# Altium PCB DiPho_digital.PcbDoc (part 3 of 3)
Units mm, origin at the board's own origin, x right, y up, seen from the top; angles counter-clockwise.
Board outline 25.2 x 25.2 mm, 4 copper layers (Top Layer, GND, Inner Layer 2, Bottom Layer), stack 1.562 mm thick; 68 components, 54 nets, 272 pads, 116 vias.
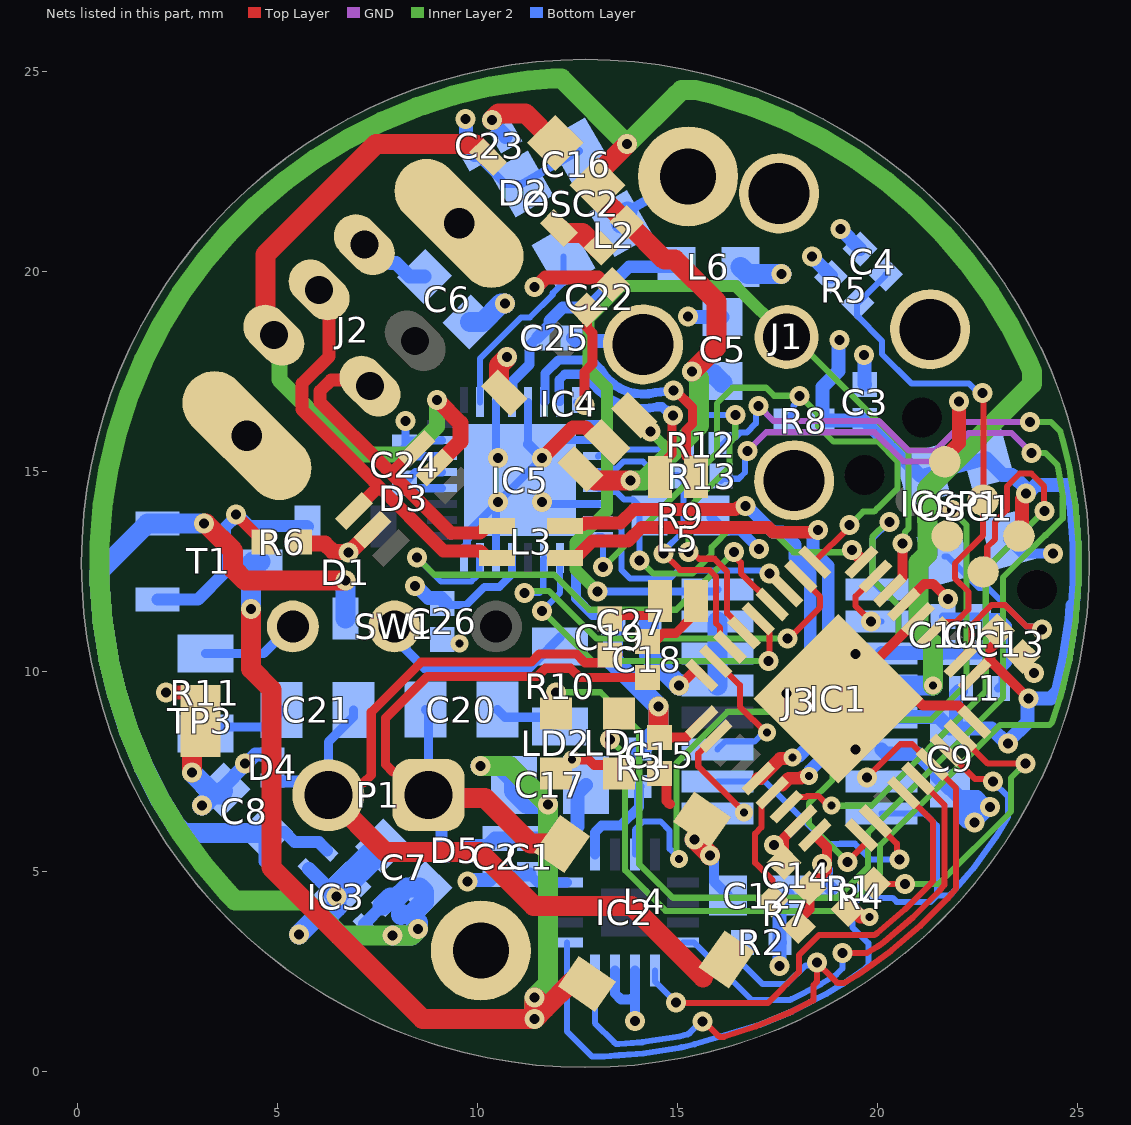
[diagram p4: the nets of this part, all layers, seen from the top]

## Via types
v1: diameter 0.5, hole 0.25, Top Layer to Bottom Layer, tented both sides, 104 vias
v2: diameter 0.45, hole 0.2, Top Layer to Bottom Layer, tented both sides, 10 vias
v3: diameter 0.5, hole 0.25, GND to Inner Layer 2, tented both sides, 2 vias

## Nets (pads, with @x,y where several pads share a name; then routed paths per layer and width w, separated by ;. In a path a pad name is that pad's centre, name@x,y a point inside that pad or via, vN(x,y) a via of type N, cw(c..) or ccw(c..) an arc to the next point about the centre after c; other vN are vias at no path point) (continued)
DAC0_OUT: IC2.3 J3.16 | length 17.1
  Inner Layer 2 w0.152: v2(15.037,5.309) 14.98,5.366 14.98,5.603 14.972,5.61 14.972,7.708 16.256,8.992 18.694,8.992 20.523,10.82 20.523,11.659 19.876,12.306 19.876,13.368 20.241,13.733 v1(20.295,13.733)
  Bottom Layer w0.152: IC2.3@13.938,5.426 13.938,6.039 14.148,6.248 14.578,6.248 14.806,6.02 14.806,5.562 15.037,5.332 v2(15.037,5.309) ; J3.16@20.1,12.05 20.075,12.05 19.876,12.249 19.876,13.314 v1(20.295,13.733)
DAC_LAT0: IC1.31 IC2.9 | length 11.5
  Top Layer w0.152: v1(14.961,1.727) 14.981,1.707 17.257,1.707 18.036,2.486 18.036,2.907 18.541,3.412 19.178,3.412 19.181,3.409 19.878,3.409 19.928,3.409 19.989,3.454 20.692,4.054 21.346,4.708 21.393,4.763 21.393,6.237 IC1.31@20.66,6.97
  Bottom Layer w0.152: IC2.9@14.438,2.526 14.438,2.251 14.961,1.729 v1(14.961,1.727)
DAC_LAT1: IC1.32 IC2.8 | length 11.3
  Top Layer w0.152: v1(19.126,2.959) 19.734,2.959 20.013,3.126 20.019,3.13 20.162,3.234 20.882,3.849 21.551,4.518 21.673,4.66 21.673,6.665 21.662,6.676 IC1.32@21.014,7.323
  Bottom Layer w0.152: IC2.8@15.138,3.226 15.413,3.226 16.851,1.788 17.777,1.788 17.814,1.788 17.846,1.804 18.59,2.183 18.961,2.411 18.974,2.423 19.126,2.576 v1(19.126,2.959)
ETH_LINE_CFILT_N: C19.1 L5.4 | length 1.3
  Top Layer w0.231: C19.1@13.513,11.321 13.592,11.4 14.25,11.4 14.435,11.585 L5.4@14.435,11.81
ETH_LINE_CFILT_P: C18.1 L5.1 | length 1.6
  Top Layer w0.231: C18.1@14.453,10.762 14.647,10.957 14.957,10.957 15.327,11.326 15.327,11.701 L5.1@15.435,11.81
ETH_LINE_DCFILT_N: C19.2 C21.2 D4.2 L4.3 P1.2 | length 25.9
  Top Layer w0.231: P1.2@6.275,6.909 6.575,7.209 7.147,7.209 7.346,7.408 7.346,8.983 8.596,10.233 11.346,10.233 11.553,10.439 12.471,10.439 12.691,10.22 13.183,10.22 13.19,10.226 13.318,10.226 C19.2@13.513,10.421 ; 15.638,2.354 15.768,2.354 16.267,2.853 L4.3@16.306,2.853
  Top Layer w0.5: P1.2@6.275,6.909 7.702,5.482 10.063,5.482 11.405,4.14 13.851,4.14 15.638,2.354
  Bottom Layer w0.231: P1.2@6.275,6.909 6.275,8.239 6.9,8.864 C21.2@6.9,9.039
  Bottom Layer w0.3: D4.2@4.877,7.27 4.902,7.245 5.533,7.245 5.869,6.909 P1.2@6.275,6.909
ETH_LINE_DCFILT_P: C18.2 C20.2 D5.2 L4.1 P1.1 | length 17.2
  Top Layer w0.231: P1.1@8.775,6.909 8.197,7.487 7.889,7.487 7.704,7.672 7.704,8.835 8.744,9.875 11.494,9.875 11.701,10.082 12.323,10.082 12.555,9.85 C18.2@14.249,9.85
  Top Layer w0.5: P1.1@8.851,6.833 10.192,6.833 11.323,5.702 12.163,5.702 L4.1@12.193,5.732
  Bottom Layer w0.231: C20.2@8.701,9.042 8.775,8.969 P1.1@8.775,6.909
  Bottom Layer w0.3: P1.1@8.775,6.909 9.099,6.584 9.099,5.536 D5.2@9.124,5.512
ETH_LINE_N: IC5.7 L5.3 | length 5.4
  Top Layer w0.231: L5.3@14.435,15.085 14.511,15.085 14.865,15.438 14.865,16.375 v1(14.883,16.393)
  Bottom Layer w0.2: IC5.7@12.053,16.745 IC5.7@12.069,16.73
  Bottom Layer w0.231: IC5.7@12.053,16.745 12.053,17.02 12.047,17.026 12.047,17.294 12.182,17.429 12.69,17.429 12.758,17.361 12.777,17.343 ccw(c14.142,18.176) 14.495,16.616 14.519,16.616 14.615,16.616 14.695,16.535 14.746,16.527 14.805,16.468 cw(c14.642,16.305) 14.806,16.467 14.829,16.445 14.832,16.445 14.851,16.425 14.864,16.412 v1(14.883,16.393)
ETH_LINE_P: IC5.6 L5.2 | length 6.9
  Top Layer w0.231: v1(14.907,17.02) 14.953,17.02 15.375,16.597 15.375,16.189 15.222,16.036 15.222,15.374 15.435,15.161 L5.2@15.435,14.86
  Bottom Layer w0.2: IC5.6@11.669,16.73 IC5.6@11.684,16.745
  Bottom Layer w0.231: IC5.6@11.684,16.745 11.684,17.02 11.69,17.026 11.69,17.451 12.026,17.787 12.595,17.787 12.838,17.787 13.061,17.563 ccw(c14.142,18.176) 14.452,16.973 14.882,17.016 ccw(c14.859,17.245) v1(14.907,17.02)
ETH_PHY_CLK: IC5.2 OSC2.3 | length 4.6
  Bottom Layer w0.152: IC5.2@10.069,16.73 10.069,17.827 11.094,18.852 11.314,18.852 11.883,19.421 11.883,19.456 12.155,19.728 OSC2.3@12.155,20.37
ETH_PHY_DIO1: IC1.15 IC5.11 R12.1 | length 10.8
  Top Layer w0.152: v1(15.276,12.991) 15.366,12.991 15.539,12.818 15.922,12.818 16.244,12.496 16.244,11.456 16.665,11.034 IC1.15@16.665,10.965
  Inner Layer 2 w0.152: v1(15.276,12.991) 15.276,14.091 16.303,15.117 16.303,15.718 16.446,15.862 v1(16.446,16.407)
  Bottom Layer w0.152: IC5.11@13.019,15.38 13.042,15.404 13.317,15.404 13.39,15.477 13.483,15.477 13.555,15.549 15.057,15.549 R12.1@15.149,15.641 ; R12.1@15.126,15.672 15.302,15.848 15.302,16.114 15.595,16.407 v1(16.446,16.407)
ETH_PHY_DIO2: IC1.16 IC5.12 R13.1 | length 8
  Top Layer w0.152: v1(14.65,12.954) 15.066,12.538 15.795,12.538 15.964,12.369 15.964,11.34 15.964,11.202 16.064,11.102 16.064,10.859 IC1.16@16.312,10.611
  Bottom Layer w0.152: IC5.12@13.019,14.98 13.042,15.004 13.317,15.004 13.39,15.077 13.478,15.077 13.647,15.246 14.139,15.246 14.475,14.91 14.996,14.91 R13.1@15.151,14.755 ; v1(14.65,12.954) 14.65,13.006 15.151,13.507 R13.1@15.151,14.755 ; R13.1@15.151,14.884 R13.1@15.151,14.755
ETH_RST: IC1.9 IC5.13 R9.1 | length 9.3
  Top Layer w0.152: IC1.9@19.6,12.733 IC1.9@19.6,12.798
  Top Layer w0.3: v1(19.36,13.038) IC1.9@19.6,12.798
  Inner Layer 2 w0.152: v1(14.05,12.772) 14.074,12.772 14.401,12.446 15.372,12.446 15.855,12.929 15.855,13.106 16.338,13.589 17.297,13.589 17.906,12.98 19.303,12.98 v1(19.36,13.038)
  Bottom Layer w0.152: IC5.13@13.019,14.58 13.042,14.556 13.317,14.556 13.39,14.483 13.478,14.483 13.659,14.302 13.888,14.302 R9.1@14.11,14.081 ; v1(14.05,12.772) 14.05,14.008 R9.1@14.122,14.081
ETH_SPI.CSN: IC1.11 IC5.19 | length 10.5
  Top Layer w0.152: v1(17.755,10.819) 17.779,10.819 18.567,11.608 18.567,11.872 18.079,12.36 IC1.11@18.079,12.379
  Inner Layer 2 w0.152: v1(11.176,11.963) 11.227,12.014 11.786,12.014 12.98,10.819 v1(17.755,10.819)
  Bottom Layer w0.152: v1(11.176,11.963) 11.556,11.963 11.645,12.053 11.645,12.806 IC5.19@11.669,12.83
ETH_SPI.INT: IC1.10 IC5.16 R8.1 | length 16.1
  Top Layer w0.152: IC1.10@18.424,12.742 19.303,13.622 v1(19.303,13.662)
  Inner Layer 2 w0.152: v1(13.141,12.608) 15.987,15.454 15.987,16.699 16.381,17.092 17.217,17.092 17.417,16.892 v1(18.055,16.892) 18.51,16.438 18.51,16.136 18.898,15.748 20.003,15.748 20.498,15.253 20.498,14.572 20.017,14.091 20.012,14.091 19.917,13.996 19.646,13.996 19.312,13.662 v1(19.303,13.662)
  Bottom Layer w0.152: IC5.16@13.019,13.38 13.117,13.38 13.141,13.356 v1(13.141,12.608) ; R8.1@17.691,16.268 17.905,16.482 17.905,16.648 18.055,16.798 v1(18.055,16.892)
ETH_SPI.MISO: IC1.13 IC5.23 | length 13
  Top Layer w0.152: v1(16.408,12.981) 16.408,12.896 16.586,12.718 16.586,12.458 IC1.13@17.358,11.687
  Inner Layer 2 w0.152: v1(8.484,12.852) 8.919,12.417 11.917,12.417 12.791,11.543 14.969,11.543 v1(16.408,12.981)
  Bottom Layer w0.152: v1(8.484,12.852) 9.087,12.249 9.85,12.249 9.972,12.371 10.045,12.444 10.045,12.806 IC5.23@10.069,12.83
ETH_SPI.MOSI: IC1.14 IC5.18 | length 8.9
  Top Layer w0.152: IC1.14@17.019,11.319 17.019,11.25 17.301,10.967 17.301,10.286 v1(17.277,10.262)
  Inner Layer 2 w0.152: v1(11.62,11.515) 12.873,10.262 v1(17.277,10.262)
  Bottom Layer w0.152: v1(11.62,11.515) 11.62,11.521 12.069,11.969 IC5.18@12.069,12.83
ETH_SPI.SCLK: IC1.12 IC5.15 | length 6.2
  Top Layer w0.152: v1@17.206,12.545 IC1.12@17.726,12.026
  Bottom Layer w0.152: IC5.15@13.019,13.78 13.042,13.756 13.405,13.756 13.478,13.683 13.597,13.564 13.597,12.54 13.818,12.319 14.807,12.319 15.016,12.528 17.189,12.528 v1@17.206,12.545
  other v1: 17.306,12.445
GND: C1.1 C2.1 C3.1 C4.1 C5.1 C6.1 C7.1 C8.1 C9.1 C10.1 C11.1 C12.1 C13.1 C14.1 C15.1 C16.1 C17.1 C23.1 C24.1 C25.1 C26.1 C27.1 D3.2 D4.1 D5.1 IC1.5 IC1.18 IC1.26 IC1.36 IC1.37 IC2.10 IC2.11 IC3.3 IC3.5 IC3.EP IC4.2 IC5.3 IC5.5 IC5.9 IC5.10 IC5.14 IC5.22 IC5.24 IC5.30 IC5.31 IC5.33 ICSP1.5 J1.C1 J1.C2 J1.C3 J1.C4 J2.GND J2.SH1 J2.SH2 J3.2 J3.3 J3.4 J3.11 J3.14 L4.4 LD1.1 LD2.1 OSC1.2 OSC2.2 pad.2 R4.2 R6.1 TP3.1 | length 74.6
  Top Layer w0.25: v2(12.363,7.8) 12.774,7.8 12.914,7.66 13.332,7.66 LD1.1@13.538,7.454 ; C15.1@14.554,7.449 14.724,7.28 14.724,6.764 14.808,6.68 ; v1(15.037,9.652) 15.064,9.652 15.407,9.996 15.513,9.996 IC1.18@15.605,9.904 ; IC1.5@21.014,11.319 IC1.37@19.016,9.321 20.961,9.321 21.138,9.144 22.022,9.144 IC1.36@22.428,8.738
  Top Layer w0.254: C14.1@17.665,5.22 17.665,5.845 18.079,6.26 IC1.26@18.079,6.263 ; C13.1@23.648,10.388 23.648,10.285 23.909,10.023 v1(23.909,9.957)
  Top Layer w0.35: v1(2.21,9.474) 2.748,9.474 3.073,9.149 TP3.1@3.073,8.763 ; v1(11.619,15.33) 12.393,16.104 12.7,16.104 13.071,15.733 IC4.2@13.248,15.733 ; R4.2@19.251,4.036 19.414,4.036 19.575,3.875 19.782,3.875 v2(19.802,3.856) ; ICSP1.5@21.686,15.238 21.686,15.357 22.035,15.707 v1(22.035,16.742)
  Top Layer w0.4: R6.1@5.575,13.233 5.614,13.195 6.185,13.195 6.39,12.99 6.744,12.99 v1@6.755,12.979 ; v1(6.782,12.979) 6.807,12.979 D3.2@7.376,13.548
  Top Layer w0.5: v1(2.87,7.468) 2.87,8.56 TP3.1@3.073,8.763 ; v1(10.359,23.781) 10.53,23.952 11.201,23.952 C16.1@11.941,23.213 ; v1(15.426,5.798) 15.815,5.408 v1(15.815,5.402)
  Bottom Layer w0.2: IC5.22@10.469,12.83 IC5.33@10.469,14.18 ; IC5.3@10.469,16.73 10.469,15.38 v1(10.519,15.33) ; IC5.33@11.269,15.68 IC5.5@11.269,16.73 ; IC5.33@11.669,14.18 IC5.14@13.019,14.18 ; IC5.33@12.069,15.78 IC5.10@13.019,15.78
  Bottom Layer w0.203: v1(8.204,16.256) C24.1@8.204,15.639 ; IC5.30@9.119,15.38 8.413,15.38 C24.1@8.179,15.614 C24.1@8.204,15.639 ; IC5.31@9.119,15.78 9.112,15.773 8.338,15.773 C24.1@8.204,15.639 ; IC5.24@9.67,13.103 9.74,13.173 9.74,13.299 9.77,13.33 9.77,13.481 10.469,14.18 IC5.33@11.069,14.78 12.069,15.78 12.367,16.078 12.645,16.078 12.747,16.18 IC5.9@13.019,16.18
  Bottom Layer w0.25: IC2.11@13.438,2.526 13.438,1.95 13.585,1.803 13.843,1.803 13.938,1.899 ; OSC2.2@13.752,21.503 pad.2@15.265,22.377 ; IC2.10@13.938,2.526 13.938,1.899 ; v1(13.945,1.266) 13.938,1.272 13.938,1.899 ; v1(15.815,5.402) 15.815,5.335 15.918,5.232 15.918,4.744 C12.1@16.268,4.394 ; OSC1.2@23.268,13.296 23.614,12.95 v1(24.387,12.95)
  Bottom Layer w0.254: IC5.33@11.269,15.68 v1(11.619,15.33) ; v1(11.619,14.23) IC5.33@11.669,14.18
  Bottom Layer w0.35: C8.1@3.635,7.01 C8.1@3.635,7.033 ; C8.1@3.635,7.1 4.191,7.656 v1(4.191,7.696) 4.232,7.696 4.455,7.92 D4.1@4.877,7.92 ; IC3.5@5.784,5.062 v1(6.473,4.372) IC3.EP@6.473,4.505 ; IC3.EP@6.222,3.846 6.222,3.74 6.703,3.259 IC3.3@6.703,3.223 ; J2.GND@7.172,20.669 7.527,20.313 7.73,20.313 7.831,20.213 7.96,20.213 8.304,19.87 C6.1@8.68,19.87 ; C7.1@7.496,5.528 C7.1@7.496,5.661 ; D5.1@9.774,5.512 9.774,5.637 10.254,5.637 C2.1@10.439,5.822 C1.1@11.303,5.822 12.197,5.822 12.497,6.121 12.497,6.949 C17.1@12.711,7.163 ; v1(10.359,23.781) 10.359,23.744 10.702,23.401 C23.1@10.702,23.364 ; C25.1@12.388,18.339 12.469,18.257 14.061,18.257 J1.C1@14.142,18.176 ; v1(15.265,18.872) 15.272,18.866 16.123,18.866 C5.1@16.129,18.859 ; v1(19.075,21.057) C4.1@19.567,20.565 ; v1(19.661,17.905) 19.673,17.893 19.673,17.188 C3.1@19.685,17.176 ; J3.11@20.1,8.05 20.2,7.95 21.002,7.95 21.494,7.458 21.494,7.373 21.794,7.073 C9.1@21.819,7.073 ; J3.14@20.1,10.45 20.111,10.461 21.63,10.461 C10.1@21.641,10.472 C11.1@22.53,10.472 ; C9.1@21.819,7.073 22.029,6.863 C9.1@22.049,6.863 ; C9.1@21.819,7.073 21.838,7.073 C9.1@22.049,6.863 ; C9.1@22.049,6.863 22.138,6.773 22.138,6.555 ; C9.1@22.049,6.863 22.485,6.863 22.657,6.691 22.698,6.691 22.773,6.617 v1(22.813,6.617) ; 22.138,6.555 22.138,6.337 22.228,6.247 22.393,6.247 v1(22.422,6.219) 22.422,6.222 22.813,6.613 v1(22.813,6.617) ; 22.138,6.555 22.171,6.588 22.785,6.588 v1(22.813,6.617)
  Bottom Layer w0.5: v1(2.87,7.468) C8.1@3.311,7.027 ; v1(3.114,6.646) C8.1@3.392,6.923 ; C8.1@3.391,6.924 3.548,6.924 C8.1@3.635,7.01 ; v1(5.537,3.429) 6.088,3.98 6.222,3.846 6.473,4.097 v1(6.473,4.372) ; OSC2.2@13.584,21.195 OSC2.2@13.752,21.503 ; C27.1@14.293,11.227 14.293,10.396 v1(15.037,9.652) ; J3.4@16,9.65 J3.3@16,10.45 J3.2@16,11.25
  Bottom Layer w0.7: IC3.EP@6.473,4.505 C7.1@7.496,5.528
  other v1: 17.408,5.664 19.456,8.052 17.729,9.445 19.456,10.439 10.519,14.23
  other v2: 9.557,10.7
I2C1.SCL: IC1.33 IC2.12 J3.10 R2.1 | length 21.4
  Top Layer w0.152: v1(15.621,1.254) 15.657,1.254 16.006,0.904 ; 16.007,0.903 ccw(c16.114,1.012) 16.161,0.867 16.969,1.129 17.863,1.5 17.869,1.502 18.406,1.776 18.406,2.159 18.488,2.241 18.488,2.718 v1(18.489,2.72) 18.882,2.327 18.978,2.231 19.001,2.208 19.166,2.208 19.499,2.413 19.504,2.416 19.873,2.679 20.335,3.014 21.072,3.643 21.757,4.328 21.968,4.576 21.968,7.076 IC1.33@21.368,7.677 20.866,8.179 20.571,8.179 v1(19.736,7.343)
  Bottom Layer w0.152: IC2.12@12.938,2.526 12.938,1.209 13.419,0.729 13.464,0.684 13.533,0.684 14.117,0.73 14.123,0.731 15.052,0.878 15.181,0.909 15.237,0.922 ccw(c15.202,1.071) 15.31,0.963 15.601,1.254 v1(15.621,1.254) ; R2.1@16.624,3.226 16.624,2.687 17.124,2.187 17.737,2.187 18.203,2.653 18.423,2.653 v1(18.489,2.72)
I2C1.SDA: IC1.34 IC2.13 J3.9 R1.1 | length 23.2
  Top Layer w0.152: IC1.34@21.721,8.03 22.442,7.31 22.819,7.31 v1(22.885,7.243)
  Bottom Layer w0.152: IC2.13@12.238,3.226 12.238,0.999 12.861,0.376 13.17,0.376 13.544,0.404 14.15,0.452 15.106,0.604 15.422,0.679 17.077,1.174 17.863,1.5 18.726,1.939 19.135,2.19 19.673,2.56 19.695,2.578 19.774,2.657 19.774,3.204 19.373,3.605 19.373,4.151 R1.1@19.774,4.552 ; R1.1@19.774,4.572 R1.1@19.774,4.552 ; J3.9@20.1,6.45 21.179,6.45 21.234,6.395 21.24,6.395 21.488,6.147 21.488,4.394 ; v1(22.885,7.243) 23.266,6.862 23.266,6.356 22.955,5.848 22.386,5.065 22.19,4.836 21.859,4.448 21.855,4.443 21.851,4.439 21.806,4.394 21.488,4.394 ; R1.1@19.774,4.552 19.988,4.338 20.381,4.338 20.482,4.237 21.331,4.237 21.488,4.394
NetC8_2: C8.2 D1.3 IC3.4 IC3.6 T1.2 | length 20.9
  Top Layer w0.5: v1(3.167,13.697) 3.21,13.697 3.893,13.014 3.893,12.566 4.191,12.268 v1(6.706,12.268)
  Bottom Layer w0.3: IC3.4@5.324,4.602 4.678,5.248 4.678,5.954 C8.2@4.696,5.972 4.714,5.99 5.173,5.99 5.431,5.732 6.033,5.732 IC3.6@6.244,5.521
  Bottom Layer w0.5: v1(3.167,13.697) 2.006,13.697 T1.2@2.002,13.701 1.752,13.701 0.55,12.499 0.55,12.223 0.625,11.271 0.774,10.328 0.997,9.399 1.292,8.491 1.658,7.609 1.666,7.592 2.091,6.759 2.462,6.153 2.504,6.111 2.651,5.964 C8.2@4.688,5.964 ; D1.3@6.706,11.321 v1(6.706,12.268)
NetC20_1: C20.1 R10.2 | length 1.6
  Bottom Layer w0.231: C20.1@10.501,9.042 10.688,8.855 R10.2@12.065,8.855
NetC21_1: C21.1 R11.2 | length 2.2
  Bottom Layer w0.231: R11.2@3.2,8.45 3.361,8.611 4.691,8.611 5.1,9.02 C21.1@5.1,9.039
NetC22_2: C22.2 IC5.8 | length 3
  Top Layer w0.25: v1(12.675,16.662) 12.675,17.487 12.872,17.684 12.872,18.464 12.737,18.598 C22.2@12.737,19.037
  Bottom Layer w0.152: v1@12.607,16.73 v1(12.675,16.662) v1@12.607,16.73 ; v1@12.607,16.73 12.469,16.73 v1@12.607,16.73
NetC24_2: C24.2 IC5.28 IC5.29 | length 2
  Bottom Layer w0.203: IC5.28@9.119,14.58 8.313,14.58 C24.2@8.179,14.714 8.445,14.98 IC5.29@9.119,14.98
NetD1_1: D1.1 R6.2 T1.1 | length 6.4
  Top Layer w0.305: v1(3.962,13.919) 3.97,13.919 4.635,13.253 R6.2@4.635,13.233
  Bottom Layer w0.305: T1.1@2.002,11.801 3.012,11.801 3.685,12.474 3.685,13.589 3.962,13.866 v1(3.962,13.919) 4.015,13.919 4.295,13.64 5.737,13.64 D1.1@5.756,13.621
NetD2_1: D2.1 L2.1 | length 1.3
  Top Layer w0.5: D2.1@12.034,21.087 12.158,20.963 12.631,20.963 13.015,20.579 L2.1@13.086,20.579
NetIC1_2: IC1.2 OSC1.3 | length 6.4
  Top Layer w0.152: IC1.2@22.075,10.258 22.075,10.327 22.352,10.604 22.352,11.157 22.859,11.664 23.188,11.664 23.733,11.118 24.051,11.118 v1(24.117,11.052)
  Bottom Layer w0.152: OSC1.3@21.674,12.869 21.755,12.869 22.534,12.09 22.758,12.09 23.73,11.118 24.051,11.118 v1(24.117,11.052)
NetIC1_35: IC1.35 R4.1 | length 7.4
  Top Layer w0.152: R4.1@19.916,4.701 19.93,4.687 20.684,4.687 v1(20.687,4.69) ; IC1.35@22.075,8.384 22.762,7.696 v1(23.698,7.696)
  Inner Layer 2 w0.152: v1(20.687,4.69) 21.534,4.69 23.339,6.495 23.339,7.337 v1(23.698,7.696)
NetIC2_1: IC2.1 R3.1 | length 2.4
  Bottom Layer w0.25: IC2.1@12.938,5.426 12.938,5.979 13.106,6.147 13.577,6.147 14.036,6.606 14.036,7.115 R3.1@14.046,7.125
NetLD1_2: LD1.2 R12.2 | length 35
  Top Layer w0.152: v1(13.31,8.294) 13.31,8.726 LD1.2@13.538,8.954
  GND w0.152: v1(17.029,16.639) 17.408,16.26 20.042,16.26 20.292,16.009 20.774,15.528 21.454,15.528 22.164,16.238 v3(23.809,16.238)
  Inner Layer 2 w0.152: v1(13.31,8.294) 13.691,7.913 13.691,5.029 14.707,4.013 19.152,4.013 20.066,4.928 20.066,5.661 23.062,8.657 24.297,8.657 24.342,8.702 24.367,8.728 24.379,8.763 24.57,9.352 24.572,9.358 24.796,10.294 24.797,10.3 24.948,11.25 25.024,12.216 25.024,13.184 24.948,14.144 24.913,14.37 24.833,14.874 24.796,15.106 24.749,15.305 24.638,15.766 24.57,15.999 24.332,16.238 v3(23.809,16.238)
  Bottom Layer w0.152: R12.2@16.089,15.621 16.089,15.641 16.303,15.855 16.453,15.855 16.568,15.97 16.732,15.97 16.962,16.201 16.962,16.573 v1(17.029,16.639)
NetLD2_2: LD2.2 R13.2 | length 34.9
  Top Layer w0.152: LD2.2@11.963,8.954 v1(11.963,9.479)
  GND w0.152: v1(16.756,15.517) 17.219,15.98 19.926,15.98 20.658,15.248 21.57,15.248 22.28,15.958 23.354,15.958 v3(23.85,15.463)
  Inner Layer 2 w0.152: v1(11.963,9.479) 13.077,9.479 14.046,8.509 14.046,5.182 14.884,4.343 18.997,4.343 19.761,5.107 19.761,5.969 23.139,9.347 23.139,12.352 24.191,13.404 24.209,13.404 24.634,13.828 24.634,14.348 24.523,15.046 24.522,15.052 24.495,15.163 24.196,15.463 24.133,15.463 v3(23.85,15.463)
  Bottom Layer w0.152: R13.2@16.089,14.757 16.148,14.816 16.532,14.816 16.689,14.974 16.689,15.45 v1(16.756,15.517)
NetR10_1: R10.1 SW1.COM | length 5.1
  Bottom Layer w0.231: SW1.COM@7.925,11.125 7.925,10.836 8.251,10.51 8.251,10.504 8.696,10.058 11.268,10.058 11.477,10.267 11.481,10.267 12.065,10.852 R10.1@12.065,10.855
NetR11_1: R11.1 SW1.L1 | length 2.5
  Bottom Layer w0.231: R11.1@3.2,10.45 4.651,10.45 5.326,11.125 SW1.L1@5.385,11.125
NRST: C4.2 IC1.4 ICSP1.3 R5.1 | length 12.5
  Top Layer w0.152: IC1.4@21.368,10.965 21.437,10.965 21.71,11.239 21.965,11.239 22.277,11.55 22.277,11.988 21.938,12.327 21.938,12.698 22.64,13.401 ICSP1.3@22.64,14.284 22.651,14.294 22.651,16.93 v1(22.624,16.957)
  Bottom Layer w0.152: C4.2@20.204,19.928 20.204,19.9 R5.1@19.506,19.203 19.492,19.189 19.492,18.887 20.113,18.266 20.113,17.936 20.853,17.196 22.291,17.196 22.53,16.957 v1(22.624,16.957)
P3V3: C1.2 C2.2 C3.2 C6.2 C9.2 C12.2 C13.2 C14.2 C15.2 C22.1 C23.2 C26.2 C27.2 IC1.1 IC1.19 IC1.27 IC2.16 IC4.5 IC5.17 IC5.21 ICSP1.1 J3.12 L1.1 L6.1 OSC1.1 OSC1.4 OSC2.1 OSC2.4 R1.2 R2.2 R3.2 R5.2 R7.2 R8.2 R9.2 | length 56
  Top Layer w0.25: C15.2@14.554,8.349 15.216,8.349 IC1.19@15.605,8.738 ; R7.2@18.036,3.605 18.036,3.785 18.301,4.05 C14.2@18.301,4.584 18.745,5.028 v1@18.745,5.181 ; IC1.27@18.433,5.909 18.745,5.597 v1@18.745,5.181 ; v1(18.613,5.181) v1@18.745,5.181 ; IC1.1@22.428,9.904 22.793,10.27 ; 22.821,10.297 22.821,10.572 22.999,10.75 22.999,10.775 C13.2@22.821,10.953 ; 22.827,10.27 v1(23.774,9.322)
  Top Layer w0.35: v1(11.43,19.609) 11.471,19.609 11.707,19.846 13.01,19.846 13.183,19.673 C22.1@13.374,19.673 ; ICSP1.1@23.538,13.386 23.617,13.464 23.617,14.308 23.711,14.402 v1(23.711,14.443)
  Top Layer w0.5: IC4.5@10.693,16.92 10.534,17.079 10.534,17.646 v1(10.744,17.856) ; v1(14.529,9.119) 14.529,8.375 C15.2@14.554,8.349
  Bottom Layer w0.2: C26.2@9.224,11.655 9.713,11.655 10.173,12.115 10.55,12.115 10.869,12.434 IC5.21@10.869,12.83 ; C23.2@9.923,22.914 9.965,22.914 10.691,22.188 OSC2.4@11.105,22.188 11.495,22.413 12.144,22.788 OSC2.1@12.534,23.013
  Bottom Layer w0.25: C1.2@11.303,4.922 11.499,4.726 IC2.16@12.238,4.726 ; IC5.17@12.469,12.83 12.469,11.822 12.879,11.412 C27.2@13.208,11.412 ; R9.2@15.849,13.894 15.849,13.844 16.174,13.519 16.581,13.519 v1(17.043,13.056) ; v1(17.548,2.64) v1@17.556,2.649 ; R2.2@17.556,3.218 R2.2@17.564,3.226
  Bottom Layer w0.3: 24.747,14.656 24.802,14.601 24.817,14.506 24.874,14.141 24.95,13.181 24.95,12.219 24.949,12.207 24.909,11.694 ccw(c25.147,11.512) 24.88,11.649
  Bottom Layer w0.35: v1(8.433,12.141) 8.473,12.141 8.777,11.837 9.085,11.837 9.203,11.719 C26.2@9.203,11.685 ; v1(9.707,23.816) 9.719,23.804 9.719,23.325 9.923,23.122 C23.2@9.923,22.914 ; v1(9.754,4.75) 9.794,4.75 9.831,4.787 10.304,4.787 C2.2@10.439,4.922 C1.2@11.303,4.922 ; v1@17.556,2.649 R2.2@17.556,3.218 ; R2.2@17.564,3.226 17.551,3.239 17.551,4.178 C12.2@17.768,4.394 ; v1(18.364,20.371) 18.364,20.358 18.842,19.881 R5.2@18.842,19.868 ; v1(18.613,5.181) 18.613,5.14 18.719,5.034 18.719,4.687 R1.2@18.834,4.572 ; v1(19.05,18.288) 19.028,18.266 19.028,17.513 18.631,17.116 R8.2@18.631,16.268 19.678,16.268 C3.2@19.685,16.276 21.063,14.898 OSC1.4@21.131,14.898 21.566,15.014 22.29,15.208 OSC1.1@22.725,15.325 23.138,14.912 23.37,14.912 v1@23.734,14.548 ; J3.12@20.1,8.85 20.115,8.865 21.527,8.865 C9.2@21.819,8.573 ; L1.1@22.095,9.507 22.036,9.507 21.97,9.441 21.97,8.725 C9.2@21.819,8.573 ; v1(23.711,14.443) 23.751,14.443 23.965,14.656 24.747,14.656 ; v1(23.774,9.322) 23.746,9.293 23.746,8.724 23.266,8.245 v1(23.266,8.204) 23.226,8.204 22.857,8.573 C9.2@21.819,8.573 ; v1@23.776,9.324 24.331,9.324 24.503,9.496 24.699,10.313 24.85,11.262 24.851,11.276 24.88,11.649
  Bottom Layer w0.5: C6.2@9.811,18.738 10.129,18.738 10.594,19.202 v1(10.693,19.202) ; C27.2@13.393,11.227 13.393,10.254 v1(14.529,9.119) 14.529,8.527 14.066,8.065 R3.2@14.046,8.065 ; L6.1@16.573,20.117 16.751,19.939 v1(17.602,19.939)
P5V0: C5.2 C7.2 C16.2 IC3.1 IC3.2 IC4.1 IC4.3 J3.13 L2.2 | length 77.3
  Top Layer w0.5: IC4.1@12.576,15.061 12.736,14.902 12.806,14.902 12.931,14.778 13.246,14.778 13.251,14.773 13.563,14.773 13.568,14.778 v1(13.824,14.778) ; L2.2@13.736,21.229 13.721,21.229 13.002,21.949 C16.2@13.002,22.152 13.002,22.44 v1(13.741,23.18) ; L2.2@13.744,21.222 14.671,20.295 14.935,20.295 15.977,19.253 15.977,18.108 v1(15.369,17.501)
  Inner Layer 2 w0.25: v1(14.326,16.002) 14.859,15.469
  Inner Layer 2 w0.5: v1(8.509,3.556) 8.357,3.404 v1(7.874,3.404) 6.555,3.404 5.827,4.133 5.68,4.279 3.938,4.279 3.771,4.446 3.151,5.172 3.139,5.188 2.59,5.945 2.091,6.759 1.658,7.609 1.292,8.491 1.286,8.51 0.997,9.399 0.774,10.328 0.625,11.271 0.55,12.223 0.55,13.177 0.625,14.129 0.628,14.149 0.646,14.261 0.774,15.072 0.779,15.091 0.997,16.001 1.292,16.909 1.658,17.791 2.091,18.641 2.59,19.455 3.151,20.228 3.771,20.954 4.446,21.629 4.461,21.642 5.172,22.249 5.188,22.261 5.945,22.81 6.759,23.309 7.609,23.742 8.491,24.108 8.663,24.164 9.381,24.397 9.399,24.403 10.328,24.626 10.95,24.724 11.271,24.775 11.872,24.822 12.099,24.822 v1(13.741,23.18) 14.967,24.405 15.1,24.538 15.437,24.538 16.001,24.403 16.89,24.114 16.909,24.108 17.773,23.75 17.791,23.742 18.641,23.309 19.439,22.82 19.456,22.81 20.228,22.249 20.939,21.642 20.954,21.629 21.629,20.954 22.249,20.228 22.81,19.455 23.309,18.641 23.742,17.791 23.866,17.492 23.866,17.186 21.234,14.554 21.234,13.757 21.253,13.737 21.253,12.941 21.031,12.719 21.031,11.049 21.387,10.693 v2(21.387,9.652) ; v1(13.824,14.778) 14.168,14.778 14.859,15.469 15.534,16.144 15.534,17.335 v1(15.369,17.501)
  Bottom Layer w0.3: IC3.2@7.163,3.683 IC3.1@7.622,4.143
  Bottom Layer w0.5: IC3.1@7.622,4.143 7.823,4.343 7.981,4.343 8.239,4.6 8.557,4.6 8.666,4.491 8.666,4.239 8.331,3.904 8.509,3.727 v1(8.509,3.556) ; v1(7.874,3.404) 8.357,3.404 v1@8.477,3.524 ; 8.085,3.916 8.085,3.948 ; v1(15.369,17.501) 15.436,17.434 15.904,17.434 C5.2@16.129,17.209 ; J3.13@20.1,9.65 20.102,9.652 v2(21.387,9.652)
PA3V3: C10.2 C11.2 IC1.6 L1.2 | length 4.9
  Top Layer w0.25: IC1.6@20.66,11.672 21.18,12.192 21.387,12.192 v1(21.768,11.811)
  Bottom Layer w0.203: C10.2@21.641,11.372 C11.2@22.53,11.372 22.548,11.354 23.063,11.354 23.266,11.151 23.266,10.209 23.129,10.072 23.129,9.69 L1.2@23.015,9.576
PD_BIAS: IC1.8 J3.15 | length 1.8
  Top Layer w0.152: v1(19.837,11.252) 19.456,11.633 19.456,11.882 IC1.8@19.953,12.379
  Bottom Layer w0.152: v1(19.837,11.252) 20.098,11.252 J3.15@20.1,11.25
PFILT3V3: C25.2 IC5.4 L6.2 | length 6.2
  Bottom Layer w0.254: IC5.4@10.869,16.73 10.869,17.244 11.305,17.68 11.305,18.156 C25.2@11.488,18.339
  Bottom Layer w0.305: C25.2@11.488,18.339 11.799,18.649 11.799,18.765 12.135,19.101 12.773,19.101 13.789,20.117 L6.2@14.973,20.117
PPODL: C17.2 L4.2 T1.3 | length 28.7
  Top Layer w0.5: v1(4.343,11.557) 4.343,10.058 4.851,9.55 4.851,5.092 8.628,1.315 v1(11.431,1.315) ; L4.2@12.81,2.236 12.794,2.252 12.368,2.252 11.687,1.571 ; v1(11.431,1.315) 11.687,1.571 ; v1(11.431,1.315) 11.43,1.317 v1(11.43,1.854) 11.687,1.597 11.687,1.571
  Inner Layer 2 w0.5: v1(10.076,7.634) 10.802,7.634 v1(11.759,6.677) 11.759,2.183 v1(11.43,1.854) 11.431,1.853 v1(11.431,1.315)
  Bottom Layer w0.5: v1(4.343,11.557) 4.343,12.701 4.393,12.751 T1.3@4.572,12.751 ; v1(10.076,7.634) 10.586,7.634 10.911,7.309 C17.2@10.911,7.163 10.911,7.013 11.236,6.688 11.748,6.688 v1(11.759,6.677)
PVBUS: D2.2 D3.5 J2.VBUS | length 18
  Top Layer w0.4: D3.5@8.931,15.103 9.576,15.748 9.576,16.205 v1(8.992,16.789)
  Top Layer w0.5: J2.VBUS@4.909,18.406 4.697,18.618 4.697,20.419 7.467,23.189 9.932,23.189 D2.2@10.267,22.855
  Inner Layer 2 w0.4: J2.VBUS@4.909,18.406 5.048,18.267 5.048,17.294 6.924,15.418 8.28,15.418 8.992,16.129 v1(8.992,16.789)
SEN_SIGNAL: IC1.7 J1.H J3.1 | length 24.3
  Top Layer w0.25: IC1.7@20.307,12.026 20.63,12.348 20.63,13.197 v1(20.626,13.2)
  Inner Layer 2 w0.152: J1.H@17.729,18.364 17.892,18.364 20.479,15.777 20.781,15.475 20.781,13.577 20.693,13.489 20.693,13.267 v1(20.626,13.2)
  Inner Layer 2 w0.3: v1(13.005,11.996) 12.446,12.555 12.446,13.222 13.233,14.01 13.233,17.094 12.776,17.551 12.776,18.821 13.589,19.634 16.459,19.634 J1.H@17.729,18.364
  Bottom Layer w0.2: v1(13.005,11.996) 15.946,11.996 J3.1@16,12.05
SWCLK: IC1.28 ICSP1.4 | length 13.7
  Top Layer w0.152: v1(19.248,5.238) 19.735,5.725 19.784,5.725 IC1.28@19.6,5.909 ; ICSP1.4@21.742,13.386 21.802,13.445 21.802,13.971 v1(21.861,14.03)
  Inner Layer 2 w0.152: v1(19.248,5.238) 18.288,6.198 18.288,6.699 18.872,7.283 18.872,8.109 19.555,8.791 21.339,8.791 22.225,9.677 22.225,13.666 v1(21.861,14.03)
SWDIO: IC1.25 ICSP1.2 | length 15.4
  Top Layer w0.152: IC1.25@17.973,6.864 18.216,6.864 18.243,6.89 18.52,6.89 18.767,6.643 v2(18.848,6.643) ; ICSP1.2@22.64,12.488 22.746,12.594 22.746,13.111 22.94,13.305 22.94,13.738 23.239,14.036 23.239,14.628 23.559,14.948 23.846,14.948 24.169,14.626 24.169,14.013 v1(24.173,14.009)
  Inner Layer 2 w0.152: v2(18.848,6.643) 19.851,6.643 22.708,9.5 22.708,12.56 24.156,14.009 v1(24.173,14.009)
TIA_GAIN_SEL_A: IC1.20 J3.8 | length 2.6
  Top Layer w0.152: IC1.20@15.958,8.384 15.519,7.945 15.519,7.626 v2(16.668,6.478)
TIA_GAIN_SEL_B: IC1.29 J3.7 | length 6.6
  Top Layer w0.152: IC1.29@19.953,6.263 19.953,6.224 20.485,5.692 20.485,5.369 v1(20.551,5.302)
  Bottom Layer w0.152: J3.7@16,7.25 17.185,7.25 18.745,5.69 19.059,5.69 19.061,5.691 19.436,5.691 19.825,5.302 v1(20.551,5.302)
TIA_GAIN_SEL_EN: IC1.17 J3.6 | length 3.7
  Top Layer w0.152: IC1.17@15.958,10.258 16.561,9.655 16.561,9.122 17.203,8.479 v2(17.239,8.479)
  Bottom Layer w0.152: J3.6@16,8.05 16.199,8.249 16.928,8.249 17.158,8.479 v2(17.239,8.479)
USBJ_D_N: D3.6 J2.D- L3.4 | length 8.2
  Top Layer w0.323: J2.D-@7.313,17.133 7.159,17.288 6.342,17.288 6.066,17.012 6.066,16.731 7.719,15.078 9.332,13.465 10.067,13.465 10.242,13.64 L3.4@10.492,13.64 ; 7.987,15.078 D3.6@8.472,15.563
USBJ_D_P: D3.1 J2.D+ L3.1 | length 10.5
  Top Layer w0.323: J2.D+@6.04,19.537 6.293,19.285 6.293,17.875 5.616,17.199 5.616,16.544 7.401,14.76 9.146,13.015 10.067,13.015 10.242,12.84 L3.1@10.492,12.84 ; D3.1@6.916,14.007 7.401,14.492
USBM_D_N: IC1.23 L3.3 | length 13.2
  Top Layer w0.323: L3.3@12.192,13.64 12.23,13.678 12.652,13.678 12.689,13.715 13.583,13.715 13.914,14.046 16.453,14.046 16.508,14.101 16.665,14.101 v1(16.699,14.135) ; IC1.23@17.019,7.323 17.07,7.323 17.565,7.818 17.851,7.818 v2(17.876,7.843)
  Bottom Layer w0.323: v1(16.699,14.135) 16.737,14.135 17.383,13.489 17.626,13.489 17.937,13.178 17.937,12.832 18.321,12.449 18.321,8.167 18.02,7.867 17.9,7.867 v2(17.876,7.843)
USBM_D_P: IC1.24 L3.2 R7.1 | length 17.2
  Top Layer w0.152: R7.1@17.371,4.269 17.386,4.283 17.386,4.586 17.371,4.6 17.371,4.788 16.942,5.218 16.942,5.944 17.098,6.1 17.098,6.627 17.372,6.901 IC1.24@17.372,6.97
  Top Layer w0.323: L3.2@12.192,12.84 12.45,12.84 12.876,13.265 13.769,13.265 14.1,13.596 17.276,13.596 17.392,13.48 18.408,13.48 18.462,13.534 v1(18.51,13.534) ; R7.1@17.371,4.269 R7.1@17.473,4.168 ; IC1.24@17.62,7.166 17.783,7.329 18.088,7.329 18.126,7.367 18.264,7.367 v2(18.288,7.391)
  Bottom Layer w0.323: v2(18.288,7.391) 18.312,7.416 18.312,7.523 18.771,7.981 18.771,12.635 18.387,13.019 18.387,13.363 18.51,13.486 v1(18.51,13.534)
pads on no net: D1.2 D3.3 D3.4 IC1.3 IC1.21 IC1.22 IC2.2 IC2.4 IC2.5 IC2.6 IC2.7 IC2.14 IC2.15 IC2.17 IC4.4 IC5.1 IC5.20 IC5.25 IC5.26 IC5.27 IC5.32 ICSP1.0 ICSP1.6 J2.ID SW1.L2

## Polygon pours and split planes (outlines as drawn)
P3V3 on Inner Layer 2 "P3V3_L03_P009" (solid, pour order 9): 0,0 0,25.3 25.3,25.3 25.3,0
GND on GND "GND_L02_P012" (solid, pour order 12): 0,0 0,25.3 25.3,25.3 25.3,0

## Other copper
Bottom Layer:
  rectangle net P5V0: 7.693,3.35 8.477,4.547
  region net NetC8_2: 5.057,4.966 5.718,5.628 5.099,6.247 4.438,5.585

## Silkscreen, mask and mechanical layers (free items; w line width, h text height)
Top Overlay:
  text "WUT" at 19.047,21.04 h1 r314
  text "ISE" at 21.554,18.232 h1 r297
  text "2022" at 22.508,16.499 h1 r281
  text "DiPho / v2.0" at 4.161,5.237 h1 r90
Mechanical 1:
  circle w0.1: c12.7,12.7 r12.6
Mechanical 15:
  circle w0.05: c12.7,12.7 r11.25